# EAGLE board mbhp_doutx4_v1 (EAGLE 4.03)
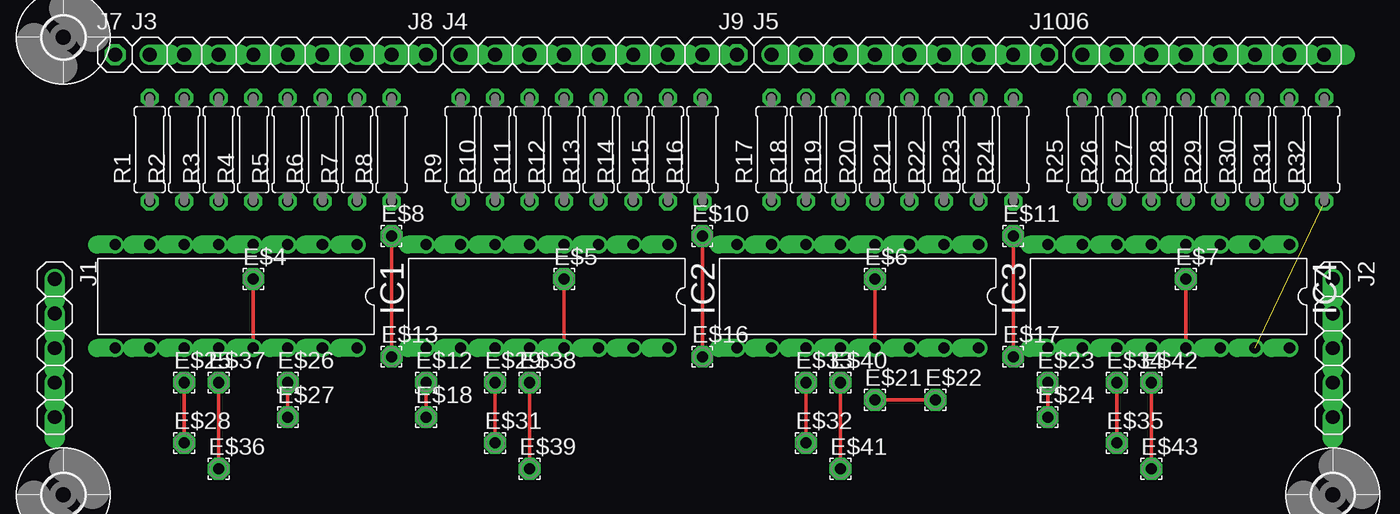
[diagram p0: board, top side]
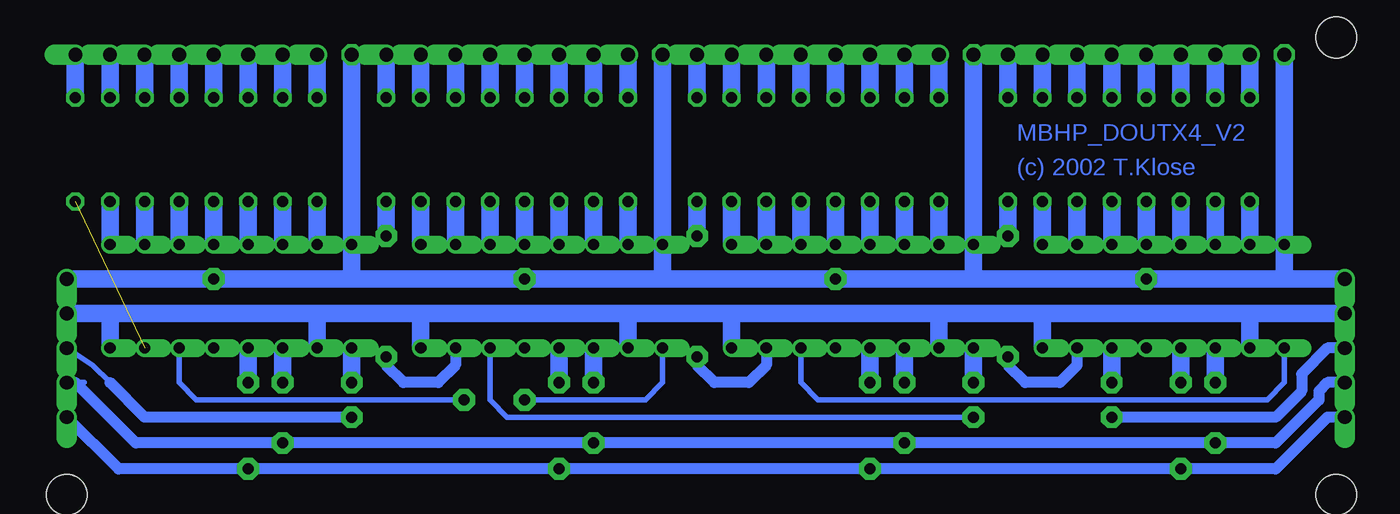
[diagram p1: board, bottom side, seen from below]

No outline drawn. Coordinates in mm, seen from the top.
Copper layers used: Top, Bottom

## Footprints (pad centres in the part's own frame; a part is rotated, then mirrored left to right if it is on the bottom)
1,6/0,8 = drill 0.813 pad 1.6 octagon: 1 0,0
3,0 = hole 3: 0,0
DIL16 = drill 0.813 offset: 1 -8.89,-3.81; 2 -6.35,-3.81; 3 -3.81,-3.81; 4 -1.27,-3.81; 5 1.27,-3.81; 6 3.81,-3.81; 7 6.35,-3.81; 8 8.89,-3.81; 9 8.89,3.81; 10 6.35,3.81; 11 3.81,3.81; 12 1.27,3.81; 13 -1.27,3.81; 14 -3.81,3.81; 15 -6.35,3.81; 16 -8.89,3.81
1X05 = drill 1.016 offset: 1 -5.08,0; 2 -2.54,0; 3 0,0; 4 2.54,0; 5 5.08,0
1X08 = drill 1.016 offset: 1 -8.89,0; 2 -6.35,0; 3 -3.81,0; 4 -1.27,0; 5 1.27,0; 6 3.81,0; 7 6.35,0; 8 8.89,0
1X01 = drill 1.016 octagon: 1 0,0
0207/7 = drill 0.813 octagon: 1 -3.81,0; 2 3.81,0

## Placement (x,y rotation side)
E$4  [1,6/0,8]  17.14,19.05 0 top
E$5  [1,6/0,8]  40.01,19.05 0 top
E$6  [1,6/0,8]  62.87,19.05 0 top
E$7  [1,6/0,8]  85.72,19.05 0 top
E$8  [1,6/0,8]  27.3,22.23 0 top
E$10  [1,6/0,8]  50.16,22.23 0 top
E$11  [1,6/0,8]  73.03,22.23 0 top
E$12  [1,6/0,8]  29.84,11.43 0 top
E$13  [1,6/0,8]  27.3,13.34 0 top
E$14  [3,0]  3.17,36.83 0 top
E$16  [1,6/0,8]  50.16,13.34 0 top
E$17  [1,6/0,8]  73.03,13.34 0 top
E$18  [1,6/0,8]  29.84,8.89 0 top
E$20  [3,0]  3.17,3.17 0 top
E$21  [1,6/0,8]  62.87,10.16 0 top
E$22  [1,6/0,8]  67.31,10.16 0 top
E$23  [1,6/0,8]  75.56,11.43 0 top
E$24  [1,6/0,8]  75.56,8.89 0 top
E$25  [1,6/0,8]  12.06,11.43 0 top
E$26  [1,6/0,8]  19.68,11.43 0 top
E$27  [1,6/0,8]  19.68,8.89 0 top
E$28  [1,6/0,8]  12.06,6.99 0 top
E$29  [1,6/0,8]  34.92,11.43 0 top
E$30  [3,0]  96.52,3.17 0 top
E$31  [1,6/0,8]  34.92,6.99 0 top
E$32  [1,6/0,8]  57.78,6.99 0 top
E$33  [1,6/0,8]  57.78,11.43 0 top
E$34  [1,6/0,8]  80.64,11.43 0 top
E$35  [1,6/0,8]  80.64,6.99 0 top
E$36  [1,6/0,8]  14.61,5.08 0 top
E$37  [1,6/0,8]  14.61,11.43 0 top
E$38  [1,6/0,8]  37.47,11.43 0 top
E$39  [1,6/0,8]  37.47,5.08 0 top
E$40  [1,6/0,8]  60.33,11.43 0 top
E$41  [1,6/0,8]  60.33,5.08 0 top
E$42  [1,6/0,8]  83.19,11.43 0 top
E$43  [1,6/0,8]  83.19,5.08 0 top
IC1  74HC595  [DIL16]  15.88,17.78 180 top
IC2  74HC595  [DIL16]  38.73,17.78 180 top
IC3  74HC595  [DIL16]  61.59,17.78 180 top
IC4  74HC595  [DIL16]  84.45,17.78 180 top
J1  [1X05]  2.54,13.97 270 top
J2  [1X05]  96.52,13.97 270 top
J3  [1X08]  18.41,35.56 0 top
J4  [1X08]  41.27,35.56 0 top
J5  [1X08]  64.14,35.56 0 top
J6  [1X08]  87,35.56 0 top
J7  [1X01]  6.99,35.56 0 top
J8  [1X01]  29.84,35.56 0 top
J9  [1X01]  52.7,35.56 0 top
J10  [1X01]  75.56,35.56 0 top
R1  220  [0207/7]  9.53,28.57 90 top
R2  220  [0207/7]  12.06,28.57 90 top
R3  220  [0207/7]  14.61,28.57 90 top
R4  220  [0207/7]  17.14,28.57 90 top
R5  220  [0207/7]  19.68,28.57 90 top
R6  220  [0207/7]  22.23,28.57 90 top
R7  220  [0207/7]  24.77,28.57 90 top
R8  220  [0207/7]  27.3,28.57 90 top
R9  220  [0207/7]  32.38,28.57 90 top
R10  220  [0207/7]  34.92,28.57 90 top
R11  220  [0207/7]  37.47,28.57 90 top
R12  220  [0207/7]  40.01,28.57 90 top
R13  220  [0207/7]  42.55,28.57 90 top
R14  220  [0207/7]  45.09,28.57 90 top
R15  220  [0207/7]  47.62,28.57 90 top
R16  220  [0207/7]  50.16,28.57 90 top
R17  220  [0207/7]  55.24,28.57 90 top
R18  220  [0207/7]  57.78,28.57 90 top
R19  220  [0207/7]  60.33,28.57 90 top
R20  220  [0207/7]  62.87,28.57 90 top
R21  220  [0207/7]  65.41,28.57 90 top
R22  220  [0207/7]  67.94,28.57 90 top
R23  220  [0207/7]  70.48,28.57 90 top
R24  220  [0207/7]  73.03,28.57 90 top
R25  220  [0207/7]  78.11,28.57 90 top
R26  220  [0207/7]  80.64,28.57 90 top
R27  220  [0207/7]  83.19,28.57 90 top
R28  220  [0207/7]  85.72,28.57 90 top
R29  220  [0207/7]  88.27,28.57 90 top
R30  220  [0207/7]  90.81,28.57 90 top
R31  220  [0207/7]  93.34,28.57 90 top
R32  220  [0207/7]  95.89,28.57 90 top

## Library data of the parts
E$4-E$8 E$10-E$13 E$16-E$18 E$21-E$29 E$31-E$43 = wirepad
E$14 E$20 E$30 = holes
IC1-IC4 = 74xx-us
J1-J10 = pinhead
R1-R32 = rcl

## Nets
S$5: IC1.7 R1.1
S$6: IC1.6 R2.1
S$7: IC1.5 R3.1
S$8: IC1.4 R4.1
S$9: IC1.3 R5.1
S$10: E$26.1 E$27.1 IC1.14 J1.3
S$11: IC1.2 R6.1
S$12: IC1.1 R7.1
S$13: IC2.7 R9.1
S$14: IC2.6 R10.1
S$15: IC2.5 R11.1
S$16: IC2.4 R12.1
S$17: IC2.3 R13.1
S$18: IC2.2 R14.1
S$19: IC2.1 R15.1
S$20: IC3.7 R17.1
S$21: IC3.6 R18.1
S$22: IC3.5 R19.1
S$23: IC3.4 R20.1
S$24: IC3.3 R21.1
S$25: IC3.2 R22.1
S$26: IC3.1 R23.1
S$27: IC4.7 R25.1
S$28: IC4.6 R26.1
S$29: IC4.5 R27.1
S$30: IC4.4 R28.1
S$31: IC4.3 R29.1
S$32: IC4.2 R30.1
S$33: IC4.1 R31.1
S$34: J3.1 R1.2
S$35: J3.2 R2.2
S$36: J3.3 R3.2
S$37: J3.4 R4.2
S$38: J3.5 R5.2
S$39: J3.6 R6.2
S$40: J3.7 R7.2
S$41: J3.8 R8.2
S$42: J4.1 R9.2
S$43: J4.2 R10.2
S$44: J4.3 R11.2
S$45: J4.4 R12.2
S$46: J4.5 R13.2
S$47: J4.6 R14.2
S$48: J4.7 R15.2
S$49: J4.8 R16.2
S$50: J5.1 R17.2
S$51: J5.2 R18.2
S$52: J5.3 R19.2
S$53: J5.4 R20.2
S$54: J5.5 R21.2
S$55: J5.6 R22.2
S$56: J5.7 R23.2
S$57: J5.8 R24.2
S$58: J6.1 R25.2
S$59: J6.2 R26.2
S$60: J6.3 R27.2
S$61: J6.4 R28.2
S$62: J6.5 R29.2
S$63: J6.6 R30.2
S$64: J6.7 R31.2
S$65: J6.8 R32.2
S$66: E$8.1 E$13.1 IC1.15 R8.1
S$67: E$10.1 E$16.1 IC2.15 R16.1
S$68: E$11.1 E$17.1 IC3.15 R24.1
S$69: IC4.15 R32.1
S$70: IC1.9 IC2.14
S$71: E$12.1 E$18.1 IC2.9 IC3.14
S$72: E$21.1 E$22.1 IC3.9 IC4.14
S$73: E$25.1 E$28.1 E$29.1 E$31.1 E$32.1 E$33.1 E$34.1 E$35.1 IC1.11 IC2.11 IC3.11 IC4.11 J1.4 J2.4
S$74: E$36.1 E$37.1 E$38.1 E$39.1 E$40.1 E$41.1 E$42.1 E$43.1 IC1.12 IC2.12 IC3.12 IC4.12 J1.5 J2.5
S$76: E$23.1 E$24.1 IC4.9 J2.3
VDD: IC1.10 IC1.16 IC2.10 IC2.16 IC3.10 IC3.16 IC4.10 IC4.16 J1.2 J2.2
VSS: E$4.1 E$5.1 E$6.1 E$7.1 IC1.8 IC1.13 IC2.8 IC2.13 IC3.8 IC3.13 IC4.8 IC4.13 J1.1 J2.1 J7.1 J8.1 J9.1 J10.1

## Tracks (layer width: path | path; a pad name or v marks a point on that pad's centre or on a via)
S$5
  Bottom 1.27: IC1.7 R1.1
S$6
  Bottom 1.27: IC1.6 R2.1
S$7
  Bottom 1.27: IC1.5 R3.1
S$8
  Bottom 1.27: IC1.4 R4.1
S$9
  Bottom 1.27: IC1.3 R5.1
S$10
  Top 0.254: E$27.1 E$26.1
  Bottom 0.813: E$27.1 7.62,8.89 5.71,10.79 5.71,12.06 3.81,13.97 J1.3
  Bottom 1.27: E$26.1 IC1.14
S$11
  Bottom 1.27: IC1.2 R6.1
S$12
  Bottom 1.27: IC1.1 R7.1
S$13
  Bottom 1.27: IC2.7 R9.1
S$14
  Bottom 1.27: IC2.6 R10.1
S$15
  Bottom 1.27: IC2.5 R11.1
S$16
  Bottom 1.27: IC2.4 R12.1
S$17
  Bottom 1.27: IC2.3 R13.1
S$18
  Bottom 1.27: IC2.2 R14.1
S$19
  Bottom 1.27: IC2.1 R15.1
S$20
  Bottom 1.27: IC3.7 R17.1
S$21
  Bottom 1.27: IC3.6 R18.1
S$22
  Bottom 1.27: IC3.5 R19.1
S$23
  Bottom 1.27: IC3.4 R20.1
S$24
  Bottom 1.27: IC3.3 R21.1
S$25
  Bottom 1.27: IC3.2 R22.1
S$26
  Bottom 1.27: IC3.1 R23.1
S$27
  Bottom 1.27: IC4.7 R25.1
S$28
  Bottom 1.27: IC4.6 R26.1
S$29
  Bottom 1.27: IC4.5 R27.1
S$30
  Bottom 1.27: IC4.4 R28.1
S$31
  Bottom 1.27: IC4.3 R29.1
S$32
  Bottom 1.27: IC4.2 R30.1
S$33
  Bottom 1.27: IC4.1 R31.1
S$34
  Bottom 1.27: R1.2 J3.1
S$35
  Bottom 1.27: R2.2 J3.2
S$36
  Bottom 1.27: R3.2 J3.3
S$37
  Bottom 1.27: R4.2 J3.4
S$38
  Bottom 1.27: R5.2 J3.5
S$39
  Bottom 1.27: R6.2 J3.6
S$40
  Bottom 1.27: R7.2 J3.7
S$41
  Bottom 1.27: R8.2 J3.8
S$42
  Bottom 1.27: R9.2 J4.1
S$43
  Bottom 1.27: R10.2 J4.2
S$44
  Bottom 1.27: R11.2 J4.3
S$45
  Bottom 1.27: R12.2 J4.4
S$46
  Bottom 1.27: R13.2 J4.5
S$47
  Bottom 1.27: R14.2 J4.6
S$48
  Bottom 1.27: R15.2 J4.7
S$49
  Bottom 1.27: R16.2 J4.8
S$50
  Bottom 1.27: R17.2 J5.1
S$51
  Bottom 1.27: R18.2 J5.2
S$52
  Bottom 1.27: R19.2 J5.3
S$53
  Bottom 1.27: R20.2 J5.4
S$54
  Bottom 1.27: R21.2 J5.5
S$55
  Bottom 1.27: R22.2 J5.6
S$56
  Bottom 1.27: R23.2 J5.7
S$57
  Bottom 1.27: R24.2 J5.8
S$58
  Bottom 1.27: R25.2 J6.1
S$59
  Bottom 1.27: R26.2 J6.2
S$60
  Bottom 1.27: R27.2 J6.3
S$61
  Bottom 1.27: R28.2 J6.4
S$62
  Bottom 1.27: R29.2 J6.5
S$63
  Bottom 1.27: R30.2 J6.6
S$64
  Bottom 1.27: R31.2 J6.7
S$65
  Bottom 1.27: R32.2 J6.8
S$66
  Top 0.254: E$13.1 E$8.1
  Bottom 0.813: IC1.15 22.23,12.7 23.5,11.43 26.04,11.43 27.3,12.7 E$13.1
  Bottom 1.27: E$8.1 R8.1
S$67
  Top 0.254: E$16.1 E$10.1
  Bottom 0.813: IC2.15 45.09,12.7 46.35,11.43 48.9,11.43 50.16,12.7 E$16.1
  Bottom 1.27: E$10.1 R16.1
S$68
  Top 0.254: E$17.1 E$11.1
  Bottom 0.813: IC3.15 67.94,12.7 69.22,11.43 71.75,11.43 73.03,12.7 E$17.1
  Bottom 1.27: E$11.1 R24.1
S$69  (1 unrouted)
S$70
  Bottom 0.406: IC1.9 6.99,11.43 8.26,10.16 41.27,10.16 42.55,11.43 IC2.14
S$71
  Top 0.254: E$18.1 E$12.1
  Bottom 0.406: E$18.1 64.14,8.89 65.41,10.16 IC3.14
  Bottom 1.27: E$12.1 IC2.9
S$72
  Top 0.254: E$21.1 E$22.1
  Bottom 0.406: IC3.9 52.7,11.43 53.98,10.16 E$21.1 | E$22.1 87,10.16 88.27,11.43 IC4.14
S$73
  Top 0.254: E$28.1 E$25.1 | E$31.1 E$29.1 | E$32.1 E$33.1 | E$35.1 E$34.1
  Bottom 0.406: 95.89,11.43 95.25,11.43
  Bottom 0.813: J1.4 3.81,11.43 4.45,10.79 4.45,10.16 7.62,6.99 E$28.1 E$31.1 E$32.1 E$35.1 91.44,6.99 95.89,11.43 J2.4
  Bottom 1.27: E$25.1 IC1.11 | E$29.1 IC2.11 | E$33.1 IC3.11 | E$34.1 IC4.11
S$74
  Top 0.254: E$36.1 E$37.1 | E$39.1 E$38.1 | E$41.1 E$40.1 | E$43.1 E$42.1
  Bottom 0.813: J1.5 3.81,8.89 7.62,5.08 E$36.1 E$39.1 E$41.1 E$43.1 92.71,5.08 J2.5
  Bottom 1.27: E$37.1 IC1.12 | E$38.1 IC2.12 | E$40.1 IC3.12 | E$42.1 IC4.12
S$76
  Top 0.254: E$24.1 E$23.1
  Bottom 0.406: 93.34,11.43 94.61,12.7 J2.3
  Bottom 0.813: E$24.1 90.81,8.89 93.34,11.43
  Bottom 1.27: E$23.1 IC4.9
VDD
  Bottom 1.27: 93.34,16.51 IC4.16 | 93.34,16.51 J2.2 | 78.11,16.51 93.34,16.51 | 78.11,16.51 IC4.10 | 70.48,16.51 IC3.16 | 70.48,16.51 78.11,16.51 | 55.24,16.51 IC3.10 | 55.24,16.51 70.48,16.51 | 47.62,16.51 IC2.16 | 47.62,16.51 55.24,16.51 | 24.77,16.51 IC1.16 | 32.38,16.51 24.77,16.51 | 32.38,16.51 IC2.10 | 32.38,16.51 47.62,16.51 | 9.53,16.51 24.77,16.51 | 9.53,16.51 IC1.10 | 9.53,16.51 J1.2 32.38,16.51
VSS
  Top 0.254: E$7.1 IC4.13 | E$6.1 IC3.13 | E$5.1 IC2.13 | E$4.1 IC1.13
  Bottom 1.27: J2.1 E$7.1 75.56,19.05 | 75.56,19.05 IC4.8 J10.1 | 75.56,19.05 E$6.1 52.7,19.05 | 52.7,19.05 IC3.8 J9.1 | 52.7,19.05 E$5.1 29.84,19.05 | 29.84,19.05 IC2.8 J8.1 | 6.99,19.05 IC1.8 J7.1 | J1.1 6.99,19.05 | 29.84,19.05 E$4.1 6.99,19.05

## Text on the board
Bottom: MBHP_DOUTX4_V2 | (c) 2002 T.Klose